# Altium PCB electrodes_interface_pcb.PcbDoc (part 2 of 4)
Units mm, origin at the board's own origin, x right, y up, seen from the top; angles counter-clockwise.
Board outline 433.27 x 43.31 mm, 4 copper layers (Top Layer, Signal Layer 1, Signal Layer 2, Bottom Layer), stack 1.308 mm thick; 42 components, 52 nets, 166 pads, 143 vias.
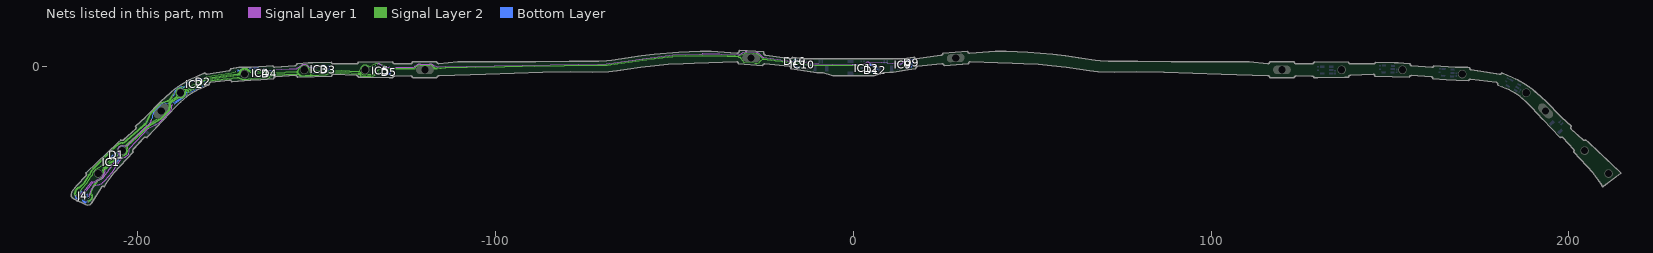
[diagram p4: the nets of this part, all layers, seen from the top]

## Via types
v1: diameter 0.4, hole 0.2, Top Layer to Bottom Layer, tented both sides, 143 vias

## Nets (pads, with @x,y where several pads share a name; then routed paths per layer and width w, separated by ;. In a path a pad name is that pad's centre, name@x,y a point inside that pad or via, vN(x,y) a via of type N, cw(c..) or ccw(c..) an arc to the next point about the centre after c; other vN are vias at no path point) (continued)
ADC_EOG_CENTER: D12.2 IC12.4 IC12.5 J4.14 | length 251.3
  Signal Layer 2 w0.075: -196.727,-15.944 -196.713,-15.934 -194.732,-14.615 cw(c-194.691,-14.678) -194.704,-14.604 -194.188,-14.513 ccw(c-194.417,-13.22) -193.491,-14.15 -191.649,-12.308 ccw(c-192.579,-11.382) -191.266,-11.399 -191.248,-9.959 -191.248,-9.958 ; -171.821,-1.825 -171.756,-1.584 cw(c-170.198,-2.001) -171.598,-1.201 cw(c-170.198,-2.001) -169.471,-0.562 -168.891,-0.855 ; -154.861,-0.174 -154.657,0.091 cw(c-153.498,-0.801) -152.548,0.31 ccw(c-152.499,0.367) -152.544,0.307 -152.403,0.2 cw(c-152.501,0.071) -152.379,0.178 cw(c-153.498,-0.801) -152.049,-0.468
  Signal Layer 2 w0.1: v1(-214.233,-37.406) -213.781,-37.389 ccw(c-213.795,-37.039) -213.543,-37.282 -212.938,-36.655 ccw(c-213.334,-36.274) -212.967,-35.864 -213.193,-35.662 ; -213.281,-35.585 cw(c-213.215,-35.51) -213.313,-35.488 -213.277,-35.327 cw(c-213.179,-35.349) -213.273,-35.314 -213.249,-35.251 -212.693,-33.762 -212.579,-33.436 -211.388,-31.732 cw(c-211.306,-31.789) -211.374,-31.716 cw(c-211.306,-31.789) -211.358,-31.703 -210.329,-31.089 ccw(c-211.098,-29.801) -209.825,-29.008 -209.849,-28.97 cw(c-209.764,-28.917) -209.854,-28.874 -209.502,-28.154 cw(c-209.412,-28.198) -209.474,-28.119 -209.03,-27.766 ccw(c-209.092,-27.688) -209.027,-27.763 -207.616,-26.555 cw(c-207.551,-26.631) -207.61,-26.55 -206.001,-25.389 ccw(c-206.059,-25.308) -205.977,-25.366 -205.893,-25.244 ccw(c-206.322,-24.943) -205.802,-25.014 -205.772,-24.796 ccw(c-205.871,-24.782) -205.771,-24.781 -205.772,-24.756 cw(c-205.597,-24.753) -205.772,-24.747 -205.723,-23.355 cw(c-204.398,-23.401) -204.559,-22.086 -204.029,-22.021 -204.027,-22.021 ccw(c-204.096,-21.47) -203.931,-22 -203.929,-21.999 -203.297,-21.801 ccw(c-203.327,-21.706) -203.268,-21.787 ccw(c-203.327,-21.706) -203.252,-21.773 -202.682,-21.135 -199.261,-18.139 -196.757,-15.946 cw(c-196.691,-16.021) -196.743,-15.936 ; -213.281,-35.585 -213.194,-35.661 ; -196.742,-15.936 -196.728,-15.927 cw(c-196.572,-16.183) -196.727,-15.926 cw(c-196.572,-16.183) -196.721,-15.923 ; -191.261,-9.957 -191.251,-9.907 -191.249,-9.902 cw(c-191.153,-9.927) -191.236,-9.871 -191.216,-9.842 cw(c-191.133,-9.898) -191.205,-9.828 -191.184,-9.806 cw(c-191.112,-9.876) -191.174,-9.797 -190.245,-9.065 -189.312,-8.329 ccw(c-189.498,-8.094) -189.202,-8.142 ccw(c-189.3,-8.125) -189.205,-8.095 -189.337,-7.674 ccw(c-189.432,-7.703) -189.339,-7.667 cw(c-188.098,-7.201) -187.602,-5.973 -187.056,-6.194 ccw(c-187.019,-6.101) -187.024,-6.201 -186.759,-6.214 ccw(c-186.754,-6.115) -186.754,-6.215 -186.578,-6.214 ccw(c-186.579,-5.814) -186.435,-6.188 -185.562,-5.851 ccw(c-185.67,-5.571) -185.522,-5.832 -185.517,-5.829 cw(c-185.468,-5.916) -185.508,-5.824 -183.847,-5.091 ccw(c-184.15,-4.405) -183.823,-5.08 ccw(c-183.866,-4.99) -183.82,-5.078 -183.776,-5.055 ccw(c-183.822,-4.967) -183.772,-5.053 -183.574,-4.937 ccw(c-183.828,-4.506) -183.478,-4.864 -182.733,-4.143 cw(c-182.663,-4.215) -182.709,-4.126 -180.744,-3.105 cw(c-180.698,-3.194) -180.724,-3.097 -180.722,-3.097 cw(c-180.696,-3.194) -180.715,-3.095 -180.713,-3.095 cw(c-180.694,-3.193) -180.711,-3.095 ; -180.71,-3.094 -180.135,-3.002 -175.121,-2.194 -172.283,-1.9 -171.827,-1.853 ; -168.89,-0.855 ccw(c-168.854,-0.762) -168.865,-0.862 -162.739,-1.52 ; -162.738,-1.52 ccw(c-162.728,-1.42) -162.724,-1.52 -161.973,-1.49 -155.68,-1.239 ; -155.679,-1.239 -155.378,-1.194 ccw(c-155.393,-1.096) -155.302,-1.137 -154.861,-0.174 ; -152.037,-0.464 -151.929,-0.923 ; -151.929,-0.925 -146.066,-0.803 cw(c-146.059,-1.103) -146.042,-0.803 -145.774,-0.819 -145.368,-0.843 ; -145.367,-0.843 -138.474,-1.151 -138.034,-1.17 ; -138.033,-1.17 ccw(c-138.029,-1.071) -137.94,-1.115 ; -137.945,-1.1 -137.781,-0.468 cw(c-136.498,-0.801) -135.552,0.126 -135.529,0.102 ccw(c-135.457,0.172) -135.411,0.083 -133.523,1.058 -133.504,1.068 cw(c-133.391,0.737) -133.334,1.082 -132.626,0.965 cw(c-132.683,0.62) -132.572,0.952 -132.337,0.874 cw(c-132.369,0.779) -132.333,0.872 -131.139,0.411 -130.238,-0.306 ; -130.238,-0.307 ccw(c-130.176,-0.228) -130.173,-0.328 -128.999,-0.292 -128.734,-0.285 cw(c-128.726,-0.585) -128.726,-0.285 cw(c-128.726,-0.585) -128.723,-0.285 -125.501,-0.292 -123.3,-0.313 -122.854,-0.317 ccw(c-122.853,-0.217) -122.788,-0.293 ; -122.769,-0.283 -122.539,-0.15 ccw(c-122.589,-0.064) -122.515,-0.131 -122.21,0.206 cw(c-121.098,-0.801) -121.098,0.699 -118.498,0.699 cw(c-118.498,-0.801) -117.295,0.094 -117.124,-0.135 ; -117.124,-0.136 ccw(c-117.037,-0.086) -117.032,-0.186 -116.4,-0.155 -114.031,-0.038 cw(c-114.021,-0.238) -114.025,-0.038 -113.923,-0.036 ; -113.922,-0.036 -108.012,0.06 -92.61,0.312 -71.513,0.66 -68.567,0.739 ccw(c-68.569,0.839) -68.554,0.74 -58.959,2.135 cw(c-58.93,1.937) -58.953,2.136 -57.905,2.256 -56.341,2.435 -50.597,3.092 ; -50.596,3.092 -50.592,3.092 cw(c-50.57,2.893) -50.577,3.093 -43.097,3.349 -42.237,3.378 cw(c-42.23,3.179) -42.23,3.379 -42.228,3.379 cw(c-42.228,3.179) -42.223,3.379 -35.305,3.227 cw(c-35.31,3.027) -35.301,3.226 -33.112,3.13 cw(c-33.125,2.83) -33.086,3.127 -32.405,3.036 ccw(c-32.391,3.135) -32.358,3.041 -32.208,3.095 -32.052,3.151 -30.404,3.837 cw(c-29.88,2.576) -29.761,3.936 -27.969,3.779 -27.2,3.719 cw(c-27.304,2.398) -26.271,3.228 ccw(c-26.194,3.291) -26.265,3.221 ; -26.264,3.22 -25.654,2.613 -25.634,2.593 ; -25.636,2.587 -25.313,2.435 -25.283,2.42 -25.132,2.349 ; -25.132,2.349 ccw(c-25.09,2.44) -25.096,2.34 -24.997,2.333 -24.105,2.275 cw(c-24.124,1.976) -24.083,2.273 -18.037,1.448 -14.914,1.298 ccw(c-14.909,1.398) -14.879,1.303 -14.496,1.422 cw(c-14.391,1.089) -14.08,1.25 -13.986,1.068 ; -13.986,1.067 ccw(c-13.897,1.114) -13.927,1.018 -13.745,0.961 cw(c-13.849,0.627) -13.733,0.958 -12.465,0.513 ; -12.465,0.513 ccw(c-12.432,0.608) -12.432,0.508 -7.168,0.525 -5.851,0.535 cw(c-5.847,0.01) -5.836,0.535 -1.546,0.457 ; -1.545,0.457 1.549,0.45 ; 1.55,0.45 ccw(c1.549,0.55) 1.558,0.45 v1(3.997,0.633)
  Bottom Layer w0.1: J4.14@-215.014,-37.271 -215.089,-37.401 -215.127,-37.482 ccw(c-215.036,-37.524) -215.084,-37.611 -214.935,-37.693 ccw(c-214.863,-37.562) -214.927,-37.698 -214.763,-37.774 ccw(c-214.7,-37.638) -214.597,-37.747 v1(-214.233,-37.406) ; v1(3.997,0.633) 4.525,0.633 IC12.4@5.05,0.625 5.575,0.643 5.84,0.643 cw(c5.84,0.543) 5.912,0.612 ; IC12.5@5.05,-1.275 5.575,-1.335 5.95,-1.335 D12.2@6.175,-1.35 6.4,-1.175 6.59,-0.68 ccw(c6.45,-0.625) 6.6,-0.625 6.6,-0.175 ccw(c6.45,-0.175) 6.559,-0.072 5.912,0.611
ADC_EOG_L: D10.2 IC10.4 IC10.5 J4.13 | length 225.5
  Signal Layer 1 w0.1: v1(-213.775,-36.515) -213.684,-36.129 -213.378,-35.251 -212.974,-34.092 -212.678,-33.71 -212.28,-33.197 -212.272,-33.187 cw(c-212.201,-33.258) -212.223,-33.16 -211.972,-33.104 ccw(c-212.081,-32.616) -211.957,-33.101 -211.811,-33.064 -211.809,-33.063 ccw(c-211.981,-32.385) -211.778,-33.055 cw(c-211.692,-33.342) -211.757,-33.049 -211.736,-33.044 -211.338,-32.991 ccw(c-211.741,-29.999) -210.391,-32.699 ccw(c-211.741,-29.999) -209.607,-32.134 -209.231,-31.758 ccw(c-209.443,-31.547) -209.211,-31.736 ccw(c-211.537,-29.856) -209.171,-31.686 ; -209.171,-31.685 ccw(c-209.33,-31.564) -209.165,-31.677 cw(c-209.082,-31.733) -209.157,-31.667 -207.187,-29.405 ccw(c-207.263,-29.339) -207.179,-29.394 -205.659,-27.061 -205.658,-27.058 cw(c-202.389,-29.505) -205.491,-26.849 -205.488,-26.845 -205.247,-26.493 cw(c-205.164,-26.549) -205.243,-26.488 -204.93,-26.08 cw(c-204.85,-26.141) -204.927,-26.077 -204.495,-25.566 cw(c-204.418,-25.631) -204.471,-25.546 -204.241,-25.402 cw(c-204.188,-25.487) -204.216,-25.391 ; -204.215,-25.391 -204.092,-25.356 -203.777,-25.25 ccw(c-204.398,-23.401) -203.253,-24.979 -203.119,-24.882 -202.888,-24.717 ccw(c-203.005,-24.554) -202.855,-24.687 -202.853,-24.684 -202.851,-24.681 ccw(c-203.079,-24.487) -202.847,-24.678 -202.597,-24.374 ccw(c-202.751,-24.247) -202.553,-24.275 -202.468,-23.676 ccw(c-204.398,-23.401) -202.481,-23.048 cw(c-202.382,-23.03) -202.471,-22.983 -202.334,-22.722 ; -202.333,-22.721 -198.632,-18.768 -197.383,-17.434 ; -197.383,-17.434 -197.236,-17.276 cw(c-197.09,-17.412) -197.231,-17.27 -197.199,-17.239 ; -197.199,-17.238 cw(c-197.058,-17.38) -197.147,-17.201 -194.047,-15.66 -194.033,-15.653 -194.02,-15.64 -192.993,-14.548 -192.993,-14.545 -192.973,-14.524 -192.922,-14.473 -190.756,-12.16 -190.75,-12.133 -190.617,-11.539 ccw(c-192.637,-11.087) -190.582,-11.334 -190.57,-11.241 ccw(c-191.166,-11.17) -190.567,-11.205 -190.543,-10.79 cw(c-190.443,-10.796) -190.518,-10.729 -190.411,-10.608 v1(-190.039,-10.414)
  Signal Layer 2 w0.075: -172.283,-2.851 -171.929,-2.854 ; -171.928,-2.854 cw(c-171.93,-2.929) -171.905,-2.859 -171.815,-2.89 -170.785,-3.341 ccw(c-170.198,-2.001) -169.953,-3.443 -168.296,-3.161 cw(c-168.283,-3.235) -168.287,-3.16 -163.975,-2.932 cw(c-163.971,-3.007) -163.971,-2.932 -163.732,-2.932 ; -137.582,-2.467 -137.326,-2.533 ccw(c-137.307,-2.46) -137.308,-2.535 -136.654,-2.546 -135.955,-2.54 -135.754,-2.491 ; -31.428,2.435 -30.601,1.343 -27.745,1.108 -27.418,1.079 ccw(c-27.305,2.387) -27.341,1.075 cw(c-27.344,1) -27.338,1.075 -27.335,1.074 cw(c-27.341,1) -27.332,1.074 -27.212,1.059 -26.894,1.035 ccw(c-26.888,1.11) -26.859,1.041 -26.385,1.237 ; -26.384,1.237 ccw(c-26.414,1.306) -26.36,1.254 -25.77,1.879 cw(c-25.715,1.828) -25.769,1.88 -25.744,1.906
  Signal Layer 2 w0.1: v1(-186.147,-7.595) -185.922,-6.891 cw(c-185.827,-6.921) -185.892,-6.845 cw(c-185.826,-6.921) -185.863,-6.828 ; -185.862,-6.828 -185.269,-6.595 ccw(c-185.67,-5.571) -185.225,-6.577 -185.222,-6.576 -183.508,-5.816 ccw(c-183.792,-5.176) -183.486,-5.806 -183.474,-5.8 -183.471,-5.799 ccw(c-184.15,-4.405) -183.369,-5.744 -183.366,-5.742 cw(c-183.316,-5.829) -183.358,-5.738 cw(c-183.315,-5.828) -183.355,-5.737 -183.192,-5.666 ccw(c-183.262,-5.506) -183.147,-5.637 -182.927,-5.443 ccw(c-182.993,-5.369) -182.924,-5.44 -182.261,-4.799 cw(c-182.191,-4.871) -182.237,-4.782 -180.868,-4.093 cw(c-180.824,-4.183) -180.858,-4.089 -180.318,-3.892 cw(c-180.224,-4.15) -180.273,-3.879 -177.867,-3.447 cw(c-177.849,-3.545) -177.86,-3.446 -177.579,-3.416 -172.283,-2.851 ; -163.73,-2.93 ccw(c-163.738,-2.83) -163.682,-2.913 -162.692,-2.244 cw(c-162.524,-2.492) -162.539,-2.193 -161.984,-2.164 ; -161.983,-2.164 -161.973,-2.163 -158.949,-1.976 -155.671,-1.84 cw(c-155.66,-2.039) -155.669,-1.84 -155.66,-1.839 -155.238,-1.817 cw(c-155.223,-2.117) -155.007,-1.909 -154.545,-2.389 ccw(c-154.473,-2.319) -154.47,-2.419 -153.225,-2.379 -152.252,-2.348 -151.782,-2.317 cw(c-151.775,-2.417) -151.75,-2.32 -151.727,-2.326 ccw(c-151.701,-2.23) -151.698,-2.33 -151.314,-2.318 ccw(c-151.536,-1.601) -151.219,-2.281 -147.478,-2.038 -146.286,-1.439 cw(c-146.149,-1.705) -146.133,-1.406 -145.774,-1.423 -145.765,-1.424 cw(c-145.774,-1.624) -145.763,-1.424 -140.361,-1.689 -138.474,-1.781 -138.158,-1.797 ; -138.158,-1.797 cw(c-138.163,-1.896) -138.11,-1.812 -137.94,-1.919 cw(c-137.993,-2.004) -137.906,-1.955 -137.863,-2.035 -137.665,-2.401 ccw(c-137.577,-2.354) -137.579,-2.454 ; -135.757,-2.49 -134.921,-2.506 -134.129,-2.267 ccw(c-134.346,-1.549) -133.854,-2.116 -133.761,-2.035 -133.341,-1.67 ccw(c-133.407,-1.595) -133.319,-1.643 -132.857,-0.804 -132.672,-0.75 -130.983,-0.487 ; -130.982,-0.487 cw(c-130.968,-0.586) -130.963,-0.486 -130.221,-0.529 ccw(c-130.216,-0.429) -130.217,-0.529 -130.208,-0.529 ccw(c-130.206,-0.429) -130.204,-0.529 -128.729,-0.485 cw(c-128.726,-0.585) -128.726,-0.485 -123.3,-0.514 -122.835,-0.517 ccw(c-122.834,-0.317) -122.826,-0.517 -122.586,-0.507 ccw(c-122.591,-0.407) -122.511,-0.468 -122.151,0.003 cw(c-121.098,-0.801) -121.098,0.524 -118.498,0.524 cw(c-118.498,-0.801) -117.247,-0.366 -117.231,-0.411 ; -117.215,-0.416 ccw(c-117.121,-0.382) -117.121,-0.482 -116.407,-0.479 -116.4,-0.479 -115.608,-0.392 -115.604,-0.392 -115.495,-0.388 -115.472,-0.387 -115.468,-0.383 -115.359,-0.383 -115.352,-0.383 -115.34,-0.371 -115.25,-0.371 -115.236,-0.37 -115.222,-0.368 ; -115.221,-0.368 -114.03,-0.247 -114.021,-0.238 -113.921,-0.236 -113.919,-0.236 -113.907,-0.236 -72.653,0.439 -68.75,0.51 -68.744,0.51 -58.93,1.937 -58.929,1.937 -54.581,2.435 -50.574,2.893 -50.57,2.893 -42.23,3.179 -42.228,3.179 ; -42.227,3.179 -35.31,3.027 -33.121,2.93 cw(c-33.125,2.83) -33.111,2.929 -32.208,2.793 -32.052,2.769 -31.723,2.72 cw(c-31.739,2.621) -31.667,2.691 -31.512,2.533 cw(c-31.886,2.165) -31.482,2.5 -31.428,2.435 ; -25.738,1.899 -25.368,2.088 cw(c-25.323,1.998) -25.321,2.098 -25.283,2.098 -24.997,2.092 -24.122,2.076 cw(c-24.124,1.976) -24.111,2.075 -17.485,1.17 -17.08,1.115 -16.776,1.074 -16.762,1.072 -14.408,1.072 v1(-14.391,1.089)
  Bottom Layer w0.1: J4.13@-214.211,-35.549 -214.294,-35.675 -214.362,-35.821 ccw(c-214.272,-35.864) -214.343,-35.933 v1(-213.775,-36.515) ; v1(-190.039,-10.414) -187.231,-8.426 ccw(c-188.098,-7.201) -187.185,-8.391 v1(-186.147,-7.595) ; -16.779,0.781 -16.809,0.811 -16.809,0.852 -16.809,0.858 -16.697,1.766 -16.664,1.799 -16.653,1.806 -16.412,1.95 -16.167,2.096 -15.958,1.95 -15.729,1.922 IC10.5@-15.225,1.72 -14.74,1.539 -14.695,1.494 v1(-14.391,1.089) ; -16.778,0.78 -16.452,0.468 -16.444,0.463 IC10.4@-15.456,-0.166
ADC_EOG_R: D9.2 IC9.4 IC9.5 J4.12 | length 264.6
  Signal Layer 1 w0.075: -122.413,0.276 -121.959,0.562 cw(c-121.098,-0.801) -121.098,0.811 -120.869,0.811 -118.498,0.811 ; -118.498,0.811 cw(c-118.498,-1.083) -117.272,0.36 ; -117.271,0.36 ccw(c-117.223,0.417) -117.223,0.342 -116.931,0.347 ; -30.785,4.125 -30.773,4.128 cw(c-30.75,4.057) -30.764,4.131 -30.202,4.236 cw(c-29.896,2.602) -29.765,4.259 ; -29.764,4.259 -27.055,4.059 ccw(c-27.05,4.134) -27.05,4.059
  Signal Layer 1 w0.1: v1(-133.391,0.737) -132.801,0.949 cw(c-132.683,0.62) -132.486,0.909 -131.788,0.434 ; -131.787,0.433 ccw(c-131.731,0.516) -131.777,0.427 -130.781,-0.078 ccw(c-130.736,0.011) -130.736,-0.089 -130.021,-0.08 cw(c-130.019,-0.28) -130.018,-0.08 -128.726,-0.085 -127.45,-0.09 -123.3,-0.105 -123.022,-0.106 -122.985,-0.106 -122.727,0.106 cw(c-120.074,-4.654) -122.442,0.254 ccw(c-122.486,0.344) -122.413,0.276 ; -116.923,0.352 ccw(c-116.876,0.44) -116.906,0.345 -116.875,0.325 -116.863,0.321 -116.853,0.317 -116.838,0.303 -116.4,0.029 -116.37,0.01 -116.072,0.01 -116.047,-0.006 -116.016,-0.006 ; -116.015,-0.006 -69.127,0.84 -57.731,2.435 -50.509,3.445 -50.504,3.445 -42.227,3.728 cw(c-42.189,2.604) -42.164,3.729 -41.037,3.704 -37.329,3.622 -36.747,3.61 cw(c-36.751,3.41) -36.74,3.609 -32.208,3.367 -32.052,3.358 -31.892,3.35 ; -31.891,3.35 ccw(c-31.887,3.45) -31.828,3.369 -30.785,4.125 ; -27.05,4.059 cw(c-27.05,3.959) -27.024,4.056 -26.882,4.019 cw(c-27.304,2.398) -26.136,3.599 -25.283,2.769 -25.268,2.755 ccw(c-25.199,2.827) -25.218,2.729 -24.997,2.688 -23.286,2.435 -22.213,2.276 -22.205,2.274 -18.341,1.664 ccw(c-18.325,1.762) -18.329,1.663 -17.485,1.625 -17.08,1.607 -15.187,1.522 ccw(c-15.183,1.622) -15.134,1.535 -14.754,1.745 cw(c-14.391,1.089) -13.976,1.713 -13.106,1.135 -12.778,0.95 ccw(c-12.729,1.037) -12.74,0.938 ccw(c-12.728,1.037) -12.731,0.937 -10.287,0.875 -9.664,0.875 cw(c-9.664,0.475) -9.66,0.875 -0.271,0.819 2.64,0.812 ccw(c2.64,0.912) 2.684,0.822 3.666,1.306 cw(c3.997,0.633) 3.966,1.382 cw(c3.997,0.633) 4.44,1.238 cw(c3.997,0.633) 4.466,1.219 4.499,1.219 4.501,1.219 7.913,1.363 7.921,1.363 7.926,1.362 12.574,0.877 13.483,0.877 v1(14.137,1.53)
  Signal Layer 2 w0.075: -196.645,-16.121 -196.616,-16.105 -194.438,-14.888 ; -194.437,-14.888 -193.73,-14.511 ccw(c-194.417,-13.22) -193.384,-14.255 -191.544,-12.415 ccw(c-192.579,-11.382) -191.201,-11.872 -191.117,-11.637 ; -188.807,-8.459 cw(c-188.81,-8.534) -188.803,-8.459 -188.209,-8.509 ccw(c-188.098,-7.201) -186.792,-7.071 cw(c-186.718,-7.064) -186.793,-7.06 -186.779,-6.807 cw(c-186.616,-6.816) -186.699,-6.676 -186.421,-6.513 ccw(c-186.459,-6.448) -186.416,-6.51 -186.397,-6.496 ; -171.66,-2.042 cw(c-170.198,-2.001) -171.433,-1.218 cw(c-170.198,-2.001) -169.45,-0.745 -168.927,-1.056 ; -154.751,-0.355 cw(c-153.491,-0.954) -154.666,-0.201 ccw(c-154.729,-0.161) -154.663,-0.197 cw(c-153.498,-0.801) -152.536,0.091 ; -152.535,0.09 ccw(c-152.482,0.143) -152.501,0.071 ; -137.322,-2.082 -137.106,-2.177 ccw(c-137.076,-2.108) -137.092,-2.182 -137.079,-2.184 ccw(c-137.062,-2.111) -137.063,-2.186 -136.3,-2.199 ; -136.3,-2.199 ccw(c-136.299,-2.124) -136.294,-2.198 -136.29,-2.198 ccw(c-136.295,-2.123) -136.285,-2.198 -135.597,-2.101
  Signal Layer 2 w0.1: v1(-213.925,-37.855) -213.447,-37.466 ccw(c-213.795,-37.039) -213.398,-37.42 -212.794,-36.794 ccw(c-213.334,-36.274) -212.738,-35.819 -212.937,-35.558 cw(c-212.858,-35.497) -212.947,-35.543 -213.041,-35.36 ; -213.042,-35.359 cw(c-212.952,-35.314) -213.046,-35.279 -213.036,-35.251 -212.626,-34.152 -212.506,-33.832 cw(c-212.412,-33.867) -212.496,-33.812 -211.235,-31.893 -211.23,-31.884 -211.223,-31.877 -211.218,-31.872 -211.211,-31.865 -211.196,-31.856 -210.192,-31.21 ccw(c-211.098,-29.801) -209.57,-29.116 -209.626,-28.992 ; -209.626,-28.991 cw(c-209.534,-28.951) -209.619,-28.898 -209.459,-28.643 ; -209.46,-28.652 -209.255,-28.447 -207.493,-26.712 ; -207.493,-26.712 cw(c-207.427,-26.788) -207.486,-26.707 -205.68,-25.405 ccw(c-205.842,-25.181) -205.581,-25.271 ccw(c-205.842,-25.181) -205.575,-25.251 -205.557,-25.234 -205.529,-25.205 -205.488,-25.204 ; -205.488,-25.204 ccw(c-205.49,-25.104) -205.456,-25.198 -203.944,-24.646 ccw(c-204.398,-23.401) -203.179,-22.882 ccw(c-204.398,-23.401) -203.18,-22.881 -203.403,-22.356 cw(c-203.311,-22.318) -203.388,-22.254 -203.121,-21.933 -203.102,-21.91 -199.09,-18.309 -196.639,-16.109 cw(c-196.572,-16.183) -196.621,-16.096 ; -191.094,-11.644 -191.093,-11.568 -191.083,-10.962 -191.062,-10.011 ; -191.062,-10.01 cw(c-190.962,-10.013) -191.024,-9.934 -190.356,-9.407 cw(c-190.294,-9.486) -190.348,-9.401 -188.991,-8.529 cw(c-188.72,-8.949) -188.786,-8.454 ; -186.398,-6.493 cw(c-186.048,-6.686) -186.194,-6.313 -185.49,-6.037 ccw(c-185.67,-5.571) -185.467,-6.028 -183.751,-5.268 ccw(c-183.792,-5.176) -183.748,-5.266 -183.735,-5.26 ; -183.734,-5.259 -183.724,-5.254 ccw(c-184.15,-4.405) -183.671,-5.226 -183.473,-5.109 ; -183.473,-5.109 ccw(c-183.828,-4.506) -183.34,-5.009 -182.615,-4.307 cw(c-182.545,-4.379) -182.591,-4.29 -180.681,-3.298 ; -180.68,-3.297 cw(c-180.634,-3.386) -180.649,-3.287 -180.135,-3.204 -175.247,-2.417 -172.283,-2.103 -171.673,-2.038 ; -168.927,-1.056 -162.234,-1.775 ccw(c-162.224,-1.676) -162.219,-1.775 -161.973,-1.763 -158.975,-1.576 cw(c-158.949,-1.976) -158.966,-1.576 -155.67,-1.439 -155.66,-1.439 -155.318,-1.421 ; -155.317,-1.421 ccw(c-155.324,-1.321) -155.237,-1.372 -155.157,-1.236 ccw(c-155.393,-1.096) -155.143,-1.209 -154.751,-0.355 ; -152.501,0.071 cw(c-153.498,-0.801) -152.198,-0.547 -152.02,-1.46 ; -152.019,-1.461 ccw(c-151.921,-1.441) -152.006,-1.495 -151.764,-1.87 ; -151.725,-1.896 ccw(c-151.536,-1.601) -151.66,-1.929 -151.391,-1.92 ccw(c-151.536,-1.601) -151.313,-1.871 -147.605,-1.645 ccw(c-147.611,-1.545) -147.566,-1.634 -146.463,-1.08 cw(c-146.149,-1.705) -146.168,-1.006 -146.062,-1.003 cw(c-146.059,-1.103) -146.05,-1.003 -145.925,-1.015 -145.774,-1.023 -145.764,-1.023 -145.746,-1.024 ; -145.744,-1.024 cw(c-145.774,-1.624) -145.741,-1.024 -142.099,-1.203 -138.474,-1.381 -138.139,-1.397 cw(c-138.17,-2.096) -137.552,-1.768 -137.424,-2.006 ; -137.424,-2.007 ccw(c-137.336,-1.959) -137.4,-2.035 ccw(c-137.336,-1.959) -137.338,-2.059 ; -135.631,-2.092 -134.996,-2.074 -134.841,-2.035 -134.26,-1.889 ccw(c-134.346,-1.549) -134.007,-1.638 -133.498,0.304 ccw(c-133.595,0.329) -133.497,0.305 v1(-133.391,0.737)
  Bottom Layer w0.1: J4.12@-215.331,-37.123 -215.386,-37.262 -215.465,-37.431 ccw(c-215.374,-37.473) -215.444,-37.544 -215.246,-37.738 ccw(c-215.036,-37.524) -215.18,-37.787 -215.031,-37.869 ccw(c-214.863,-37.562) -215.011,-37.879 -214.847,-37.955 ccw(c-214.7,-37.638) -214.638,-37.982 v1(-213.925,-37.855) ; v1(14.137,1.53) 14.577,1.53 14.684,1.638 15.018,1.707 15.2,1.745 15.708,2.068 15.73,2.083 16.427,2.113 cw(c16.432,2.013) 16.429,2.113 cw(c16.435,1.961) 16.586,1.98 16.641,1.533 cw(c16.492,1.515) 16.638,1.479 16.509,0.963 D9.2@16.307,0.762 16.096,0.639 D9.2@16.085,0.638 ; IC9.5@15.251,-0.184 15.225,-0.079 15.247,-0.078 15.866,-0.053 ; IC9.5@15.431,-0.141 15.766,-0.073 15.866,-0.053 ; 16.197,0.014 16.191,0.013 ; D9.2@16.364,0.592 16.39,0.387 16.39,0.381 16.39,0.347 16.208,0.042 16.191,0.013 ; 15.866,-0.053 16.191,0.013 ; 15.866,-0.053 16.105,-0.043 16.144,-0.042 16.18,-0.005 16.191,0.013
ADC_REF: D1.2 IC1.4 IC1.5 J4.3 | length 22.1
  Signal Layer 2 w0.1: v1(-216.698,-35.06) -216.64,-35.002 -216.42,-35.002 -216.194,-34.776 -215.829,-34.271 -215.611,-33.97 -214.307,-32.567 ccw(c-214.49,-32.397) -214.272,-32.521 -213.234,-30.693 -212.963,-30.396 -212.828,-30.262 -212.8,-30.233 ; -212.8,-30.233 -212.639,-30.073 -212.448,-29.436 cw(c-212.352,-29.465) -212.438,-29.414 -212.259,-29.112 cw(c-211.098,-29.801) -211.742,-28.615 -211.528,-28.499 -207.88,-26.238 v1(-206.322,-24.943)
  Bottom Layer w0.1: v1(-216.698,-35.06) -216.128,-35.155 -216.046,-35.156 ccw(c-216.036,-35.056) -215.951,-35.111 -215.86,-34.967 ccw(c-215.944,-34.913) -215.853,-34.955 -215.851,-34.95 -215.846,-34.931 -215.83,-34.849 J4.3@-215.797,-34.809 ; IC1.4@-207.294,-25.131 -206.401,-24.239 D1.2@-206.359,-24.239 ; D1.2@-206.336,-24.239 D1.2@-206.359,-24.239 ; v1(-206.322,-24.943) -206.371,-24.522 D1.2@-206.359,-24.239 ; IC1.5@-205.95,-26.475 -204.927,-25.452 -204.927,-24.777 -205.824,-23.88 -206,-23.88 D1.2@-206.359,-24.239
ADC_TL1: D2.2 IC2.4 IC2.5 J4.4 | length 55.3
  Signal Layer 2 w0.1: v1(-217.213,-36.071) -217.453,-35.589 -217.454,-35.588 cw(c-217.364,-35.544) -217.464,-35.551 -217.476,-35.357 cw(c-217.376,-35.351) -217.471,-35.319 -217.314,-34.852 -217.309,-34.839 cw(c-217.214,-34.871) -217.308,-34.838 -217.139,-34.369 ; -217.139,-34.368 cw(c-216.528,-34.589) -216.989,-34.132 ; -216.989,-34.132 -216.897,-34.04 cw(c-216.579,-34.358) -216.707,-33.927 -216.31,-33.809 ccw(c-216.338,-33.713) -216.296,-33.804 ccw(c-216.338,-33.713) -216.269,-33.785 -214.813,-32.376 -213.737,-30.555 -213.572,-30.276 cw(c-213.357,-30.403) -213.525,-30.219 -213.186,-29.909 -213.184,-29.906 -213.171,-29.891 -213.163,-29.876 -213.143,-29.832 -212.877,-29.149 cw(c-212.784,-29.185) -212.868,-29.131 -212.652,-28.796 cw(c-211.098,-29.801) -212.437,-28.524 -212.215,-28.292 -206.105,-22.213 ; -206.098,-22.216 cw(c-205.922,-22.394) -206.095,-22.213 -205.894,-22.019 ccw(c-206.033,-21.875) -205.892,-22.017 -205.693,-21.851 cw(c-204.398,-23.401) -204.329,-21.383 -204.212,-21.387 -203.837,-21.18 ccw(c-203.885,-21.092) -203.833,-21.178 -203.388,-20.912 ccw(c-203.439,-20.826) -203.369,-20.897 ccw(c-203.439,-20.826) -203.364,-20.893 -203.273,-20.791 -203.167,-20.671 ; -203.166,-20.671 -203.055,-20.546 cw(c-202.704,-20.859) -203.015,-20.506 -199.764,-17.635 -197.753,-15.859 ccw(c-197.819,-15.784) -197.735,-15.838 -196.992,-14.685 -196.421,-13.158 cw(c-196.327,-13.193) -196.399,-13.124 -195.502,-12.184 cw(c-194.417,-13.22) -195.478,-12.16 -193.639,-10.32 cw(c-192.579,-11.382) -193.024,-9.949 -192.834,-9.89 cw(c-192.805,-9.986) -192.827,-9.888 ; -192.826,-9.888 -191.62,-9.627 ccw(c-191.641,-9.529) -191.579,-9.607 -191.443,-9.501 -191.036,-9.18 ccw(c-191.16,-9.022) -191.014,-9.159 v1(-190.353,-8.449)
  Bottom Layer w0.1: v1(-217.213,-36.071) -217.233,-36.52 ccw(c-217.083,-36.526) -217.147,-36.662 -216.984,-36.738 ccw(c-216.92,-36.602) -216.926,-36.752 -216.775,-36.758 ccw(c-216.771,-36.658) -216.68,-36.701 -216.664,-36.667 J4.4@-216.6,-36.531 ; v1(-190.353,-8.449) -189.737,-7.484 ccw(c-190.011,-7.309) -189.722,-7.458 -189.276,-6.595 cw(c-188.098,-7.201) -189.276,-6.593 cw(c-188.098,-7.201) -187.745,-5.925 -187.529,-5.984 ccw(c-187.503,-5.888) -187.512,-5.987 ccw(c-187.501,-5.888) -187.434,-5.962 -186.57,-5.184 -186.556,-5.172 ccw(c-186.623,-5.097) -186.529,-5.131 -186.523,-5.115 -186.523,-4.566 -186.463,-4.506 -185.395,-3.938 -185.296,-3.938 -185.236,-3.998 -184.677,-3.998 -184.441,-3.761 -184.338,-3.761 -184.258,-3.682 IC2.4@-183.583,-3.682 ; IC2.4@-183.517,-3.449 -183.208,-3.551 -183.193,-3.556 -183.177,-3.556 -183.153,-3.556 IC2.4@-183.132,-3.546 ; IC2.4@-183.131,-3.545 -182.588,-3.271 -182.55,-3.271 -182.095,-3.402 -182.056,-3.402 -181.823,-3.278 -181.724,-3.278 -181.664,-3.338 -181.442,-3.755 ; IC2.5@-182.625,-5.127 -182.148,-4.906 -181.695,-4.664 D2.2@-181.477,-4.594 -181.36,-4.334 -181.426,-3.807 ccw(c-181.575,-3.825) -181.442,-3.756
  other v1: -184.419,-3.761
ADC_TL2: D4.2 IC4.4 IC4.5 J4.5 | length 74.6
  Signal Layer 1 w0.1: v1(-216.255,-35.908) -216.255,-35.862 -215.433,-35.04 -215.404,-35.02 -215.181,-34.92 -215.166,-34.913 -215.111,-34.886 -215.095,-34.869 -215.091,-34.864 -213.039,-32.217 -212.997,-32.163 cw(c-212.839,-32.286) -212.978,-32.141 cw(c-212.839,-32.286) -212.894,-32.093 -212.706,-32.04 cw(c-212.486,-32.809) -212.665,-32.029 -212.267,-31.937 ccw(c-212.289,-31.84) -212.217,-31.909 ; -212.232,-31.912 -209.991,-30.759 -209.177,-29.343 v1(-209.11,-28.797)
  Signal Layer 2 w0.075: -196.693,-16.39 -196.657,-16.369 -193.852,-14.746 cw(c-193.814,-14.811) -193.849,-14.745 -193.66,-14.644 ccw(c-194.417,-13.22) -193.278,-14.361 -191.437,-12.521 ccw(c-192.579,-11.382) -191.211,-12.235 -190.93,-11.785 ; -171.551,-2.218 -171.512,-2.106 ccw(c-171.584,-2.082) -171.509,-2.078 cw(c-170.198,-2.001) -171.243,-1.207 cw(c-170.198,-2.001) -169.504,-0.888 -169.013,-1.194 ccw(c-168.927,-1.056) -168.999,-1.202 -168.562,-1.418
  Signal Layer 2 w0.1: v1(-209.11,-28.797) -207.338,-26.849 cw(c-207.264,-26.916) -207.323,-26.835 -205.225,-25.318 ; -205.233,-25.327 -203.862,-24.802 ccw(c-204.398,-23.401) -202.902,-23.299 ccw(c-204.398,-23.401) -202.902,-23.297 -202.972,-22.269 cw(c-202.798,-22.257) -202.969,-22.22 -202.951,-22.141 cw(c-202.854,-22.162) -202.941,-22.114 cw(c-202.854,-22.162) -202.921,-22.088 -198.935,-18.465 -197.765,-17.401 -196.646,-16.387 ; -190.93,-11.785 -190.92,-11.718 -190.889,-11.303 ccw(c-192.437,-11.24) -190.888,-11.272 -190.865,-10.178 cw(c-190.765,-10.18) -190.837,-10.11 -190.572,-9.834 cw(c-190.499,-9.903) -190.555,-9.82 -188.888,-8.7 cw(c-188.832,-8.784) -188.841,-8.684 -188.749,-8.676 cw(c-188.733,-8.85) -188.733,-8.675 -188.102,-8.676 ccw(c-188.098,-7.201) -186.624,-7.227 -186.617,-6.875 cw(c-186.517,-6.877) -186.567,-6.79 -186.312,-6.645 ccw(c-186.398,-6.493) -186.284,-6.626 -186.189,-6.543 ccw(c-186.254,-6.468) -186.185,-6.54 cw(c-186.048,-6.686) -186.12,-6.499 -185.419,-6.224 ccw(c-185.67,-5.571) -185.386,-6.211 -183.67,-5.45 ccw(c-183.792,-5.176) -183.661,-5.446 -183.647,-5.44 ccw(c-184.15,-4.405) -183.569,-5.398 -183.372,-5.282 ccw(c-183.828,-4.506) -183.202,-5.153 ; -183.201,-5.152 -182.496,-4.471 cw(c-182.427,-4.543) -182.473,-4.454 -180.617,-3.49 -180.598,-3.483 -180.596,-3.482 cw(c-180.568,-3.578) -180.585,-3.48 -180.135,-3.407 -180.103,-3.402 -177.306,-2.951 -172.283,-2.317 -171.574,-2.228 ; -168.562,-1.418 v1(-164.548,-1.996)
  Bottom Layer w0.1: v1(-216.255,-35.908) -216.198,-35.85 -216.198,-35.727 -215.906,-35.435 -215.877,-35.406 -215.832,-35.406 -215.794,-35.407 -215.7,-35.349 -215.574,-35.079 J4.5@-215.48,-34.957 ; v1(-164.548,-1.996) -164.523,-2.344 IC4.5@-164.387,-2.585 -163.869,-2.47 -163.315,-2.431 D4.2@-163.092,-2.399 -162.88,-2.209 -162.725,-1.7 ccw(c-162.868,-1.656) -162.718,-1.646 -162.75,-1.197 ccw(c-162.9,-1.208) -162.878,-1.059 -163.978,-0.903 IC4.4@-164.519,-0.69
ADC_TL3: D3.2 IC3.4 IC3.5 J4.6 | length 93.1
  Signal Layer 1 w0.075: -155.466,-0.295 -154.265,0.444 cw(c-153.498,-0.801) -152.531,0.295 -152.076,-0.106 ccw(c-152.026,-0.05) -152.039,-0.124 -151.761,-0.172 -151.751,-0.174
  Signal Layer 1 w0.1: v1(-165.522,-0.576) -164.937,-0.956 ; -164.937,-0.956 ccw(c-164.883,-0.872) -164.878,-0.972 -161.985,-0.828 -161.973,-0.828 -157.659,-0.561 -155.675,-0.435 -155.449,-0.274 ; -151.783,-0.176 cw(c-151.537,-1.574) -151.761,-0.172 cw(c-151.537,-1.574) -151.234,-0.187 -151.096,-0.19 v1(-149.348,0.146)
  Signal Layer 2 w0.1: v1(-217.729,-36.03) -217.689,-35.398 cw(c-217.14,-35.433) -217.661,-35.257 -217.503,-34.788 cw(c-216.698,-35.06) -217.497,-34.772 -217.328,-34.302 cw(c-216.528,-34.589) -217.13,-33.99 -217.039,-33.899 cw(c-216.579,-34.358) -216.764,-33.735 -216.586,-33.682 ; -216.585,-33.682 ccw(c-216.614,-33.586) -216.548,-33.661 -216.49,-33.61 -215.177,-32.45 -214.982,-32.26 ccw(c-215.051,-32.188) -214.965,-32.24 -213.967,-30.552 -213.744,-30.175 cw(c-213.357,-30.403) -213.66,-30.071 -213.352,-29.789 -213.348,-29.78 -213.053,-29.05 cw(c-211.094,-29.842) -212.53,-28.292 ccw(c-212.598,-28.218) -212.527,-28.289 ; -212.531,-28.281 -206.231,-22.063 ; -206.239,-22.075 cw(c-205.922,-22.394) -206.234,-22.069 -206.033,-21.875 ccw(c-206.102,-21.803) -206.032,-21.874 cw(c-205.891,-22.016) -206.029,-21.871 -205.833,-21.685 -205.604,-21.537 cw(c-204.398,-23.401) -204.321,-21.183 -204.264,-21.185 ; -204.263,-21.185 ccw(c-204.26,-21.085) -204.209,-21.171 -203.975,-21.03 ; -204.006,-21.049 -203.504,-20.748 -203.422,-20.657 -203.204,-20.413 cw(c-202.704,-20.859) -203.147,-20.357 -199.906,-17.494 -197.906,-15.727 ccw(c-197.972,-15.652) -197.888,-15.706 -197.391,-14.936 ccw(c-197.475,-14.882) -197.383,-14.921 -196.59,-13.043 cw(c-196.498,-13.082) -196.57,-13.012 -193.469,-9.825 -191.863,-9.469 ccw(c-191.885,-9.371) -191.831,-9.455 ; -191.831,-9.455 -191.623,-9.321 -191.16,-9.022 v1(-190.011,-7.309) ; v1(-187.622,-5.211) -186.579,-5.814 -184.014,-4.727 ccw(c-184.15,-4.405) -183.973,-4.707 -183.777,-4.592 ccw(c-183.828,-4.506) -183.757,-4.577 -182.978,-3.824 -182.977,-3.823 cw(c-182.84,-3.969) -182.932,-3.791 -180.871,-2.72 ; -180.87,-2.72 cw(c-180.824,-2.809) -180.849,-2.712 cw(c-180.824,-2.809) -180.839,-2.71 -180.37,-2.635 -173.743,-1.567 -173.377,-1.508 -173.373,-1.507 -172.848,-1.379 ccw(c-172.872,-1.282) -172.829,-1.372 v1(-172.472,-1.201)
  Bottom Layer w0.1: v1(-217.729,-36.03) -217.395,-36.685 ccw(c-217.083,-36.526) -217.232,-36.843 -217.068,-36.92 ccw(c-216.92,-36.602) -216.951,-36.951 -216.512,-36.99 ccw(c-216.503,-36.89) -216.413,-36.933 ; -216.413,-36.933 -216.356,-36.81 J4.6@-216.283,-36.679 ; v1(-190.011,-7.309) -189.324,-6.336 cw(c-188.098,-7.201) -188.835,-5.895 v1(-187.622,-5.211) v1@-187.592,-5.218 ; v1(-172.472,-1.201) -172.166,-0.997 ccw(c-172.221,-0.914) -172.163,-0.994 cw(c-171.954,-1.276) -172.011,-0.93 ; -172.017,-0.932 -171.857,-0.995 cw(c-171.986,-1.321) -171.811,-1.017 -171.683,-1.092 ; -171.639,-1.105 cw(c-171.633,-1.005) -171.682,-1.092 ; -169.527,-0.66 ccw(c-169.483,-0.57) -169.462,-0.668 -167.687,-0.258 ; -169.528,-0.66 ccw(c-170.198,-2.001) -170.934,-0.694 -171.463,-0.992 cw(c-171.622,-0.708) -171.489,-1.005 -171.683,-1.092 ; -167.733,-0.26 -167.709,-0.257 -167.632,-0.256 -166.485,-0.176 cw(c-166.461,-0.525) -166.313,-0.208 v1(-165.522,-0.576) ; v1(-149.348,0.146) -148.691,0.18 IC3.4@-148.176,0.389 -147.643,0.244 -146.74,0.291 cw(c-146.735,0.191) -146.649,0.243 -146.483,-0.035 cw(c-146.612,-0.112) -146.462,-0.104 -146.439,-0.554 cw(c-146.588,-0.561) -146.446,-0.607 -146.61,-1.113 D3.2@-146.825,-1.299 -147.048,-1.337 -147.559,-1.363 IC3.5@-148.077,-1.508
ADC_TL4: D5.2 IC5.4 IC5.5 J4.7 | length 108.6
  Signal Layer 1 w0.1: v1(-215.444,-36.321) -215.405,-36.282 -215.405,-35.746 -214.695,-35.035 -214.311,-34.537 -213.774,-33.819 -212.786,-32.544 -212.768,-32.526 cw(c-212.486,-32.809) -212.575,-32.419 -212.061,-32.3 ccw(c-212.084,-32.203) -212.012,-32.273 ; -212.037,-32.266 -211.25,-31.84 -209.824,-31.067 ccw(c-209.991,-30.759) -209.81,-31.059 -209.727,-31.009 ; -209.726,-31.009 -209.644,-30.958 -209.201,-30.189 -209.198,-30.184 -208.637,-29.428 -208.603,-29.393 -208.53,-29.393 -208.325,-29.188 -208.325,-29.007 -205.626,-25.373 ; -205.641,-25.408 -205.626,-25.373 ; -205.611,-25.352 -205.626,-25.373 ; v1(-195.972,-14.687) -196.366,-15.081 cw(c-196.684,-15.228) -196.43,-15.468 -197.088,-16.278 -197.503,-16.484 ccw(c-197.058,-17.38) -197.76,-16.668 -199.257,-18.143 -202.074,-20.92 ccw(c-201.933,-21.063) -202.084,-20.931 -203.037,-22.018 -204.454,-22.078 ccw(c-204.398,-23.401) -205.565,-24.031 -205.506,-24.138 ccw(c-205.418,-24.091) -205.504,-24.142 -205.289,-24.5 cw(c-205.375,-24.552) -205.283,-24.592 -205.626,-25.373
  Signal Layer 2 w0.075: -137.676,-2.649 -137.413,-2.684 -137.404,-2.684 -136.408,-2.7 -136.338,-2.701 -135.138,-2.717 -134.793,-2.721 -134.788,-2.721 ; -134.787,-2.706 -134.777,-2.706
  Signal Layer 2 w0.1: v1(-181.669,-5.217) -181.508,-4.674 cw(c-181.412,-4.703) -181.454,-4.612 -180.266,-4.059 ; -180.266,-4.059 cw(c-180.224,-4.15) -180.24,-4.051 -180.135,-4.034 -179.3,-3.892 -178.203,-3.706 cw(c-178.186,-3.805) -178.196,-3.706 -173.743,-3.233 -171.986,-3.064 cw(c-171.976,-3.163) -171.94,-3.07 -170.785,-3.517 ccw(c-170.198,-2.001) -169.926,-3.603 -168.654,-3.387 cw(c-168.637,-3.485) -168.642,-3.386 -163.684,-3.12 ; -163.663,-3.125 -163.662,-3.125 ccw(c-163.67,-3.025) -163.615,-3.108 ; -163.614,-3.108 -162.58,-2.409 ; -162.58,-2.409 cw(c-162.524,-2.492) -162.529,-2.392 ; -162.529,-2.392 -161.973,-2.364 -155.66,-2.039 -155.228,-2.017 ; -155.227,-2.017 cw(c-155.223,-2.117) -155.151,-2.048 -154.628,-2.591 ccw(c-154.556,-2.522) -154.553,-2.622 -154.464,-2.619 -152.245,-2.548 ccw(c-152.252,-2.348) -152.239,-2.547 -151.786,-2.518 ccw(c-151.536,-1.601) -151.731,-2.531 -151.282,-2.517 ccw(c-151.536,-1.601) -151.17,-2.478 -147.407,-2.234 ; -147.407,-2.234 ccw(c-147.414,-2.134) -147.368,-2.223 -146.195,-1.617 cw(c-146.149,-1.705) -146.144,-1.605 -145.774,-1.624 -138.474,-1.981 -138.166,-1.996 -138.105,-2.035 -138.082,-2.05 -137.786,-2.599 ccw(c-137.698,-2.552) -137.7,-2.652 ; -134.794,-2.709 -134.792,-2.708 -134.787,-2.706 -133.832,-2.383 -133.812,-2.374 -133.247,-2.035 -132.693,-1.703 cw(c-132.642,-1.788) -132.614,-1.692 -131.944,-1.888 -131.831,-2.035 v1(-131.699,-2.209) ; -134.792,-2.709 -134.788,-2.709
  Bottom Layer w0.1: v1(-215.444,-36.321) -215.301,-35.414 -215.221,-35.243 J4.7@-215.163,-35.105 ; v1(-195.972,-14.687) -195.728,-13.027 cw(c-194.417,-13.22) -195.355,-12.284 -193.515,-10.444 cw(c-192.579,-11.382) -192.507,-10.059 -191.058,-10.138 ; -191.058,-10.138 ccw(c-191.053,-10.038) -191.027,-10.135 -189.532,-9.731 ; -189.516,-9.73 -187.366,-8.306 ccw(c-188.098,-7.201) -187.042,-8.002 -186.473,-7.25 ; -186.447,-7.264 cw(c-186.38,-7.338) -186.4,-7.24 -185.169,-6.982 ccw(c-185.2,-6.835) -185.132,-6.969 v1(-181.669,-5.217) ; v1(-131.699,-2.209) -131.454,-2.209 -131.454,-2.251 -131.001,-2.035 IC5.5@-130.929,-2.001 -130.404,-1.99 -129.95,-1.99 D5.2@-129.725,-1.975 -129.5,-1.8 -129.31,-1.304 ccw(c-129.45,-1.25) -129.3,-1.25 -129.3,-0.8 ccw(c-129.45,-0.8) -129.31,-0.747 -129.52,-0.186 ; IC5.4@-130.929,-0.101 -130.404,-0.122 -129.613,-0.122 cw(c-129.613,-0.222) -129.52,-0.186